# Altium PCB 2019_PerfUSB_ch340.PcbDoc
Units mil, origin at the board's own origin, x right, y up, seen from the top; angles counter-clockwise.
Board outline 690 x 1915 mil, 4 copper layers (1-TOP, 2-Signal, 3-GND, 4-BOT); 14 components, 11 nets, 63 pads, 31 vias.
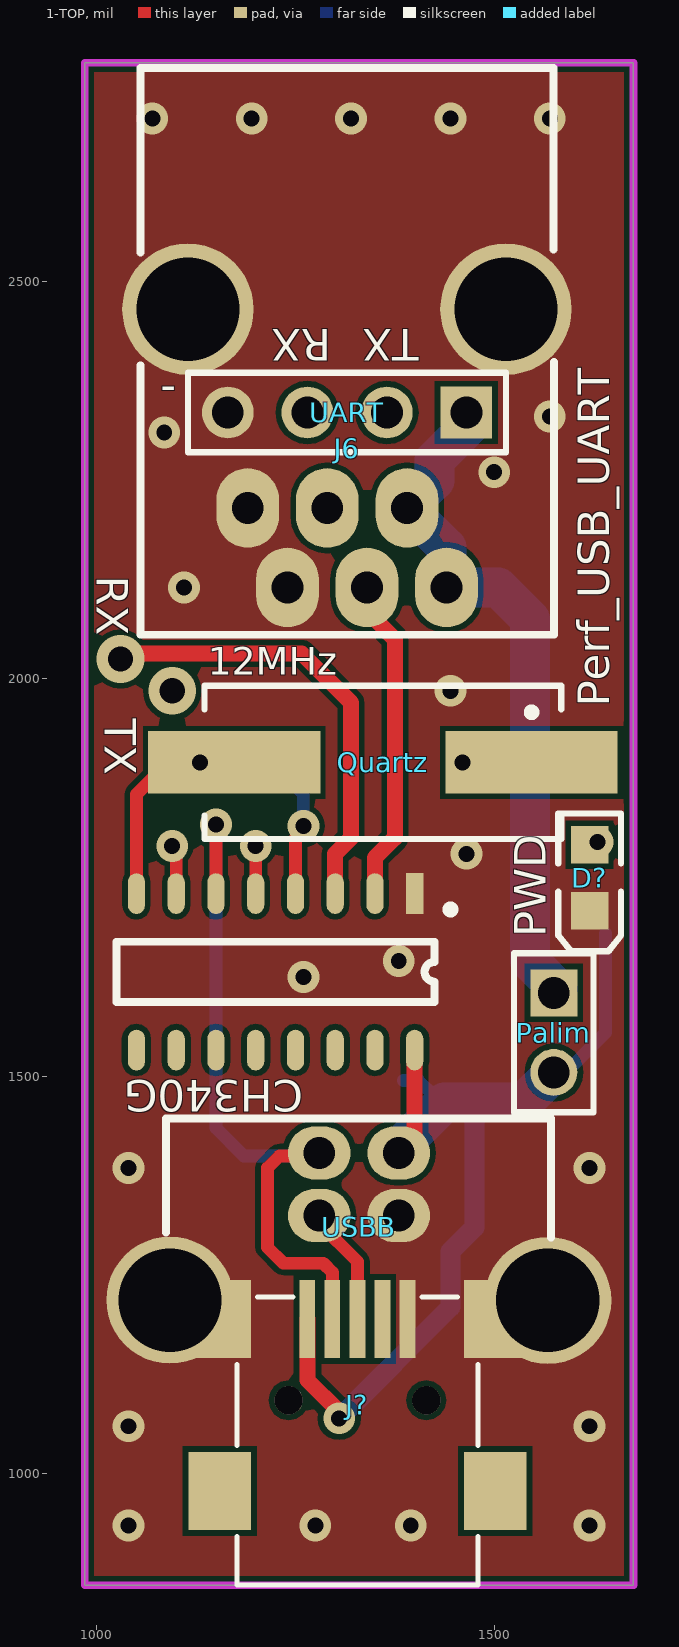
[diagram p0: 1-TOP view]
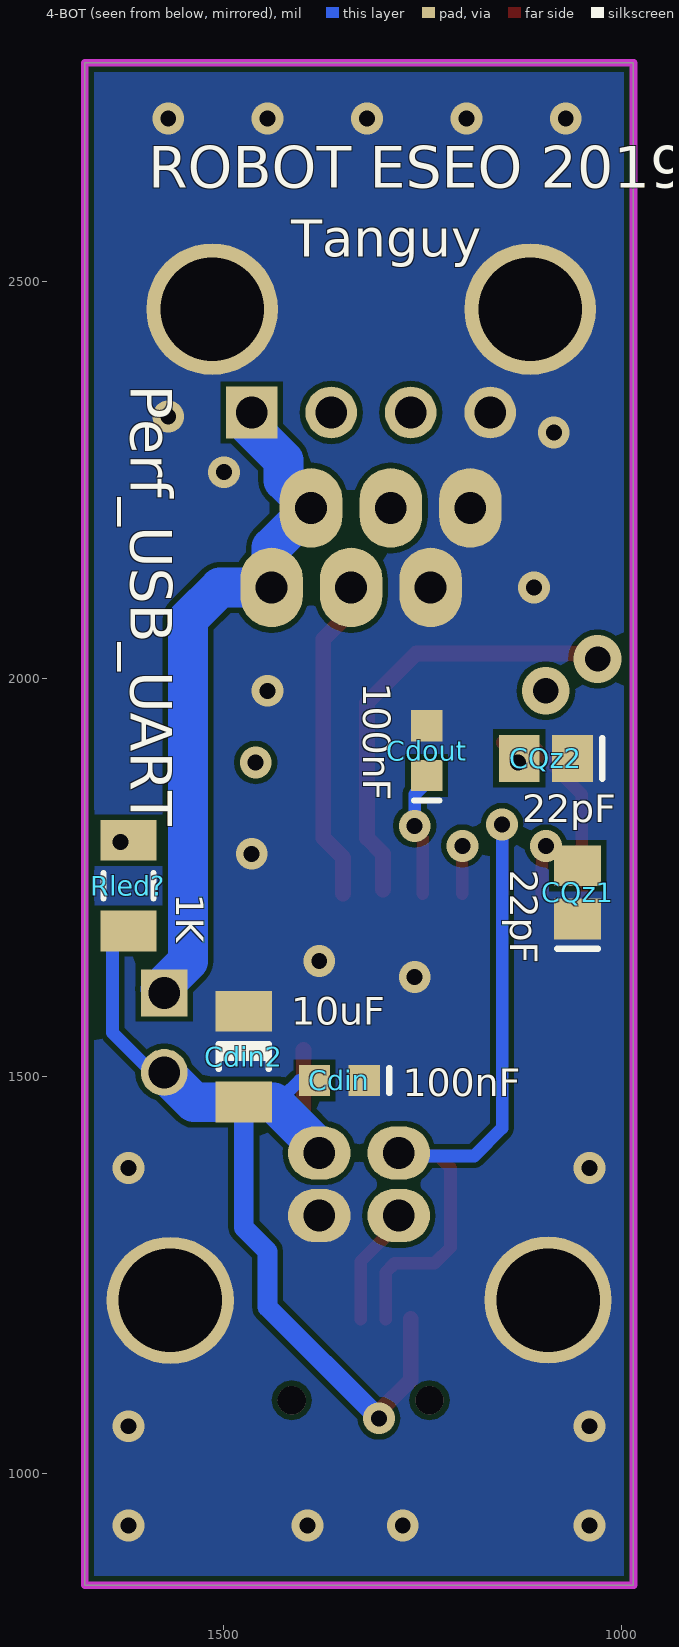
[diagram p1: 4-BOT view, seen from below]
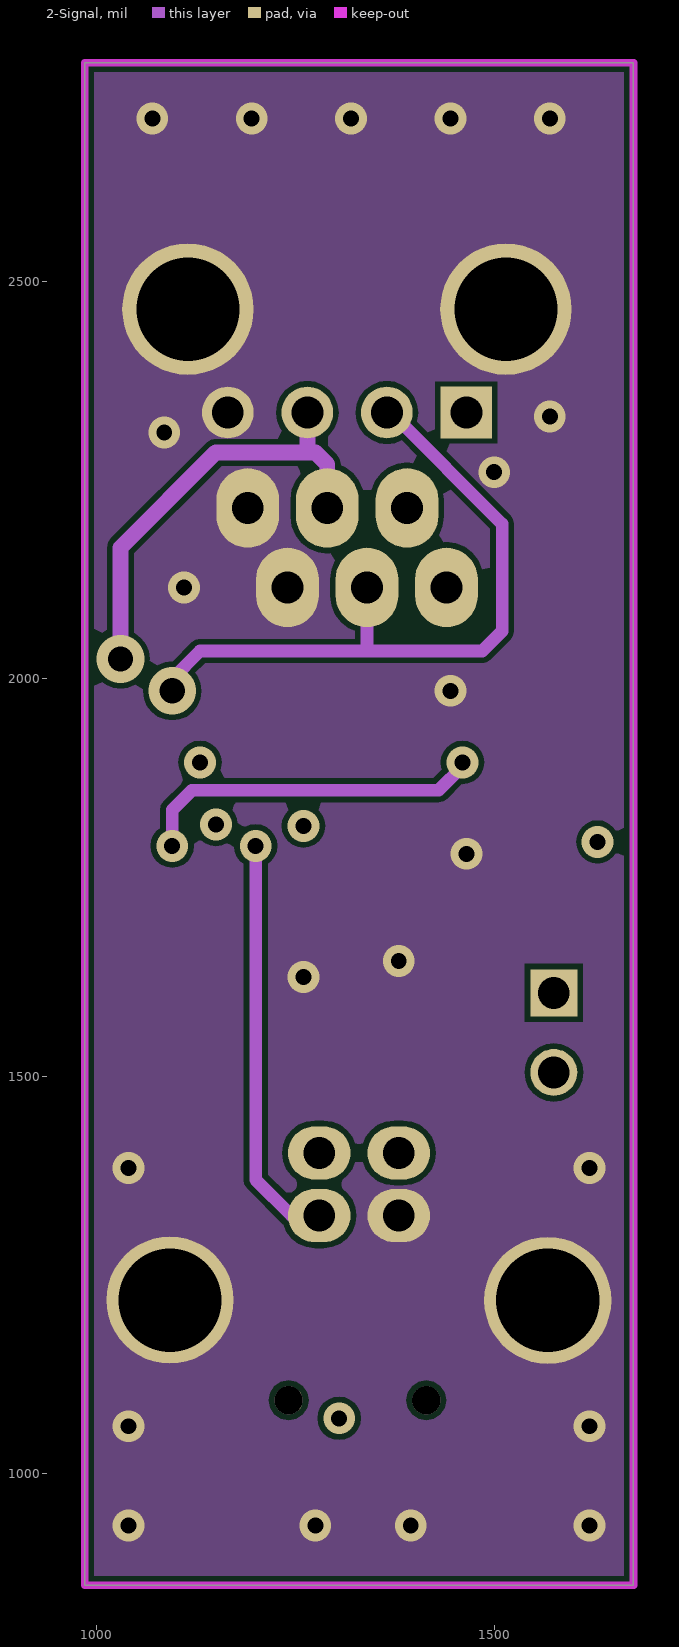
[diagram p2: 2-Signal]
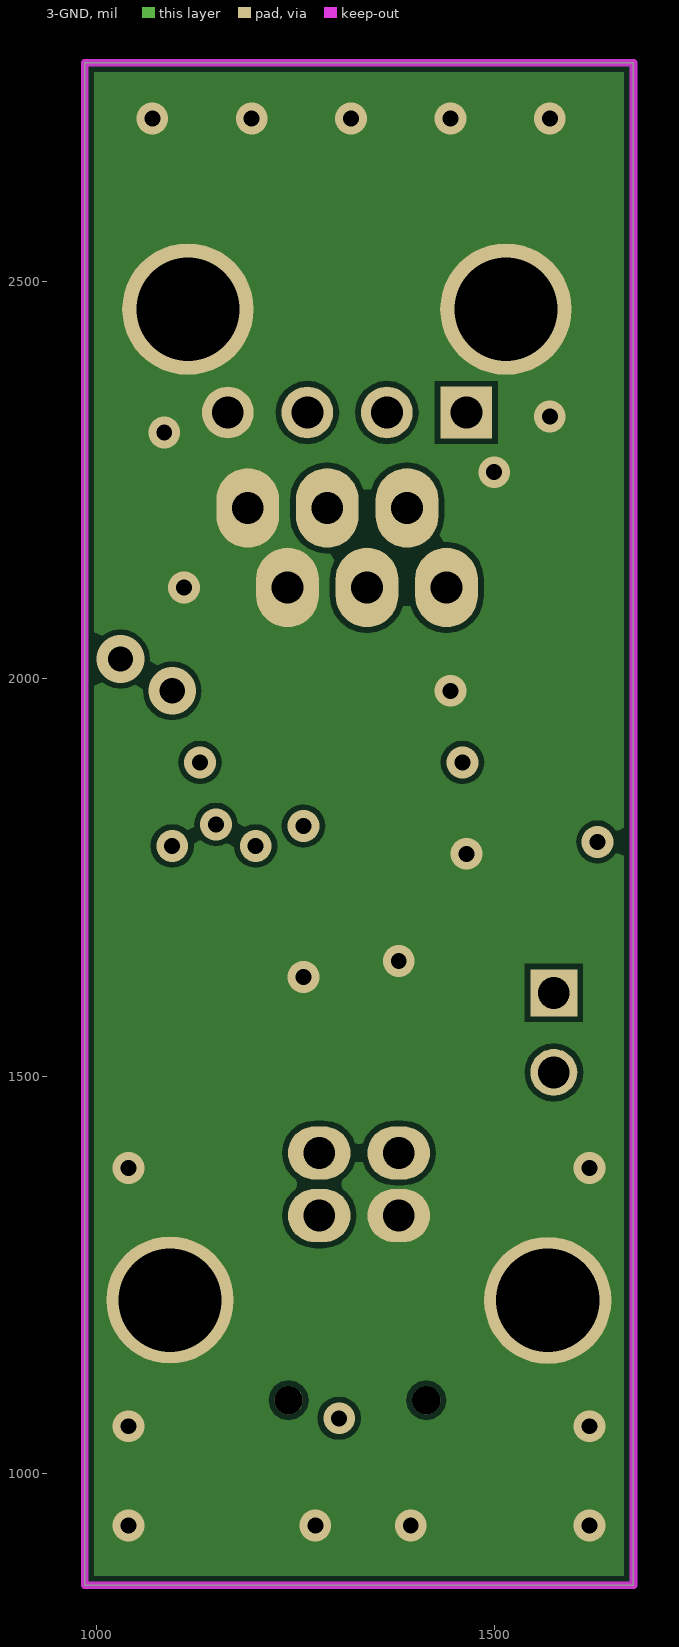
[diagram p3: 3-GND]
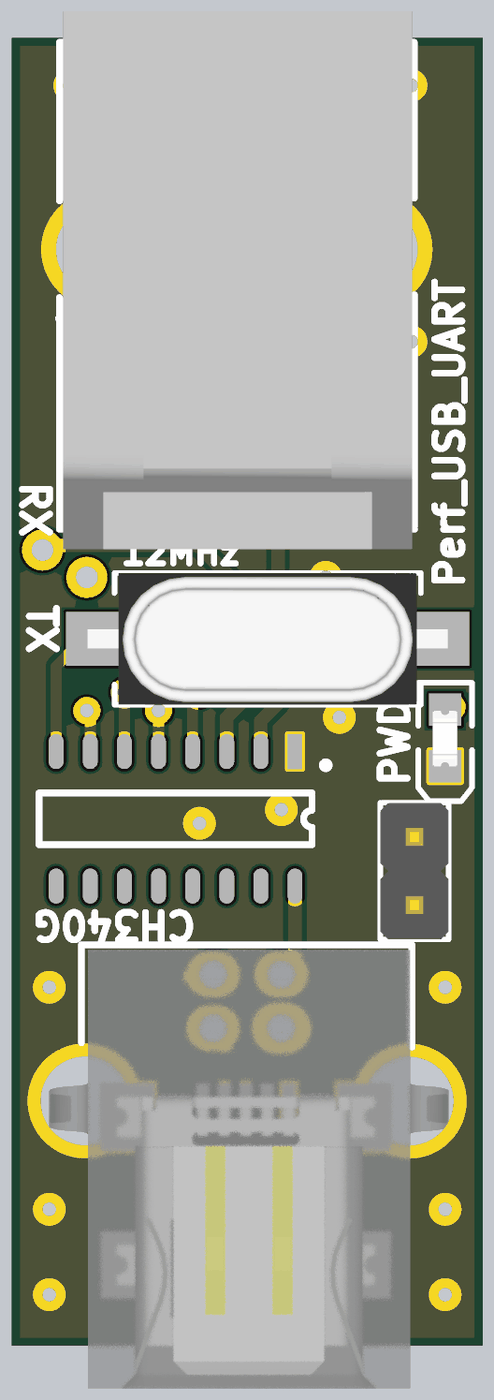
[diagram p4: 3D render of the assembled board from above, using the file's embedded part models]
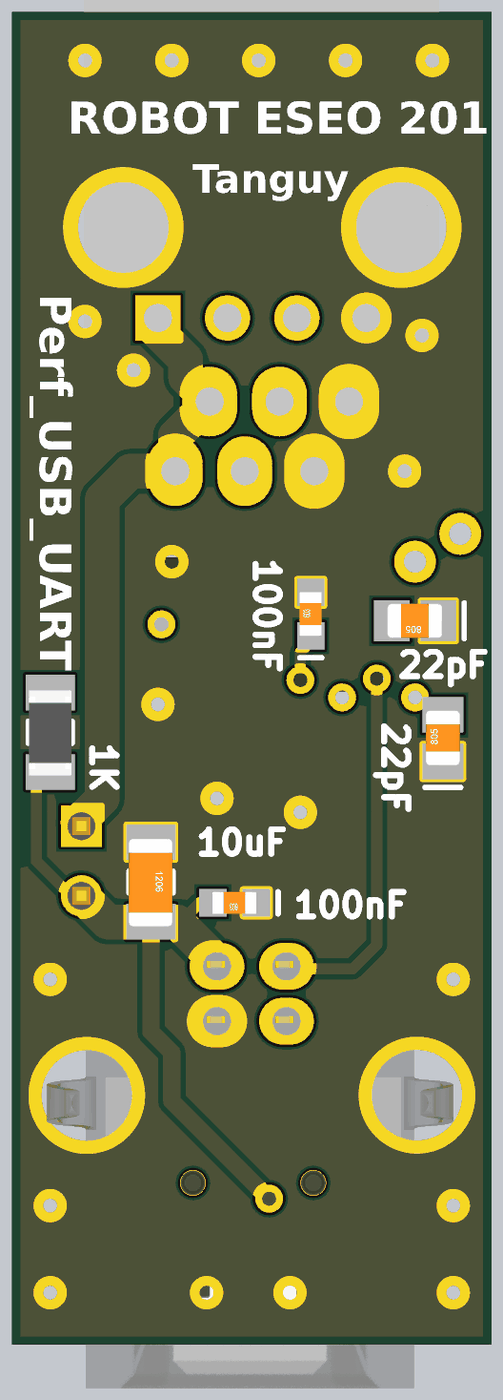
[diagram p5: 3D render of the assembled board from below, using the file's embedded part models]

## Layer stack, top to bottom
Top Solder: solder mask 0.4, Solder Resist, Dk 3.5
1-TOP: signal copper 1.4
Dielectric1: core 12.6, FR-4, Dk 4.8
2-Signal: signal copper 1.4
Dielectric2: prepreg 12.6, FR-4, Dk 4.8
3-GND: signal copper 1.4
Dielectric3: core 12.6, FR-4, Dk 4.8
4-BOT: signal copper 1.4
Bottom Solder: solder mask 0.4, Solder Resist, Dk 3.5

## Board outline
985,860 985,2775 1675,2775 1675,860

## Design rules (kind name [scope] priority, off if disabled: settings)
Clearance [All] p1: gap=7 ignorepadtopadclearanceinfootprint=FALSE except(0: Arc-Hole Track-Hole SMDPad-Hole THPad-Hole Via-Hole Fill-Hole Poly-Hole Region-Hole Text-Hole)
HoleSize [All] p1: absolutevalues=TRUE maxlimit=200 minlimit=1 maxpercent=80.000 minpercent=20.000
PolygonConnect [All] p1: connectstyle=Direct reliefconductorwidth=10 reliefentries=4 polygonreliefangle="90 Angle" airgapwidth=10
RoomDefinition 2019_PerfUSB_ch340 [InComponentClass('2019_PerfUSB_ch340')] p1: confinementstyle=ConfineIn formatcopy=TRUE lockcomponents=FALSE outline 0,0 2000,0 2000,1000 0,1000
RoutingVias [All] p1: holewidth=28 width=50 viastyle="Through Hole" minholewidth=28 minwidth=50 maxholewidth=28 maxwidth=50
SilkToSolderMaskClearance SilkscreenOverComponentPads [IsPad] p1: minsilkscreentomaskgap=10 clearancetoexposedcopper=TRUE
SolderMaskExpansion [All] p1: expansion=4
Width [All] p1: maxlimit=100 minlimit=12 preferedwidth=16
28 further rules are at their usual default settings.

## Components (designator, comment, footprint, x,y, rotation, side; value= is the part's Value field where it differs from the comment)
Cdin "100nF" C0603_N 1355,1495 r0 bottom
Cdin2 "10uF" C1206_N 1475,1525 r270 bottom
Cdout "100nF" C0603_N 1245,1910 r90 bottom
CH340G "CH340G" SOP16 1400,1730 r270 top
CQz1 "22pF" C0805_N 1055,1731.54 r90 bottom
CQz2 "22pF" C0805_N 1095,1900 r0 bottom
D? "LED" LED_0805 1620,1750 r270 top
J6 "UART" RJ11_6/6 1240,2115 r90 top
J? "Mini USB 2.0 Type B" USB_MiniB_Horizontal 1327.99,1042.44 r0 top
Palim "Jump" HDR1X2 1575,1605 r270 top
Quartz "12MHz" HC49/4H_SMX 1360,1895 r180 top
Rled? "1K" R1206_N 1620,1740 r270 bottom
UART "BARRETTE4" HDR1X4 1465,2335 r180 top
USBB "USB_B" USB_B_COUDE 1280,1403.74 r0 top

## Footprints (in the part's own frame and the unit in brackets; to place one, negate y for a bottom-side part, rotate by r counter-clockwise, add the part's x,y. Pads: shape width x height; smd on the part's side, far side on the other; paste and mask are expansions set on the pad)
C0603_N [mm] "Chip Capacitor, Body 1.6x0.8mm, IPC Medium Density"
  rect 1x1 smd: 1(-0.8,0) 2(0.787,0)
  silkscreen extent -1.6,-0.4 -1.6,0.4, body extent -0.8,-0.39 0.8,0.41, height 0.32
C0805_N [mm] "Chip Capacitor, Body 2.0x1.3mm, IPC Medium Density"
  rect 1.3x1.5 smd: 1(-0.85,0) 2(0.85,0)
  silkscreen extent -1.8,-0.65 -1.8,0.65, body extent -0.99,-0.63 1.01,0.62, height 0.8
C1206_N [mm] "Chip Capacitor, Body 3.2x1.6mm, IPC Medium Density"
  rect 1.3x1.8 smd: 1(-1.45,0) 2(1.45,0)
  silkscreen extent -0.4,-0.8 0.4,0.8, body extent -1.57,-0.81 1.63,0.79, height 1.02
HC49/4H_SMX [mm] "Quartz Crystal, SM; Body 13.4 (inc. leads) x 4.9 mm (LxW max)"
  rect 5.5x2 smd: 1(-4.75,0) 2(4.75,0)
  silkscreen extent -5.7,-2.45 5.7,2.45, body extent -6.7,-2.45 6.7,2.45, height 5.08
HDR1X2 [mm]
  rect 1.5x1.5 hole 1.016: 1(0,0)
  round 1.5 hole 1.016: 2(2.54,0)
  silkscreen extent -1.27,-1.27 3.81,1.27, body extent -1.27,-1.27 3.81,1.27, height 10.1
HDR1X4 [mil] "Connector; Header; 4 Position"
  rect 65x65 hole 40: 1(0,0)
  round 65 hole 40: 2(100,0) 3(200,0) 4(300,0)
  silkscreen extent -50,-50 350,50
LED_0805 [mm] "SM LED; 2 Flat Leads"
  rect 1.2x1.2 smd: 1(-1.05,0) 2(1.05,0)
  silkscreen extent -2.05,-1 2.35,1, body extent -1.05,-0.64 1.06,0.64, height 1.2
R1206_N [mm] "Chip Resistor, Body 3.2x1.6mm, IPC Medium Density"
  rect 1.3x1.8 smd: 1(-1.45,0) 2(1.45,0)
  silkscreen extent -0.4,-0.8 0.4,0.8, body extent -1.68,-0.87 1.68,0.87, height 0.71
RJ11_6/6 [mm] "Connector; RJ11; 6P/6C; Low Profil; Right Angle; Pin Spacing=2.54mm"
  oval 2.54x2 hole 1.016: 1(0,-5.08) 2(2.54,-3.82) 3(0,-2.54) 4(2.54,-1.27) 5(0,0) 6(2.54,1.27)
  round 4.2 hole 3.302: FIX1(8.89,3.18) FIX2(8.89,-6.98)
  silkscreen extent -1.51,-8.51 16.59,4.7, body extent -2.25,-8.43 17.75,4.57, height 16
SOP16 [mm]
  rect 1.3x0.55 smd: 1(0,0)
  oval 1.3x0.55 smd: 2(0,-1.27) 3(0,-2.54) 4(0,-3.81) 5(0,-5.08) 6(0,-6.35) 7(0,-7.62) 8(0,-8.89) 9(5,-8.89) 10(5,-7.62) 11(5,-6.35) 12(5,-5.08) 13(5,-3.81) 14(5,-2.54) 15(5,-1.27) 16(5,0)
  silkscreen extent 0.38,-9.53 3.46,1.27
USB_B_COUDE [mm] "Connector; USB; type B; 4 Position; Pin Spacing=2.54mm/12.07mm"
  oval 2x1.7 hole 1.016: 1(2.54,0) 2(0,0) 3(0,-2) 4(2.54,-2)
  round 4.064 hole 3.302: FIX1(-4.77,-4.7) FIX2(7.3,-4.71)
  silkscreen extent -4.9,-2.7 7.4,1.1, body extent -6.1,-15.39 8.76,0.91, height 10.75
USB_MiniB_Horizontal [mm] "Mini USB 2.0 Type B SMT Horizontal 5 Contacts ref WURTH : 65100516121"
  rect 0.5x2.5 smd: 1(-1.6,3.875) 2(-0.8,3.875) 3(0,3.875) 4(0.8,3.875) 5(1.6,3.875)
  round 0.9 hole 0.9: M1(-2.2,1.275) M2(2.2,1.275)
  rect 2x2.5 smd: S1(-4.4,3.875) S2(4.4,3.875) S3(-4.4,-1.625) S4(4.4,-1.625)
  silkscreen extent -3.85,-4.62 3.85,4.58, body extent -4.8,-4.63 4.8,4.62, height 3.92

## Part data
Cdin Cdin2 Cdout: library part Capacitor, "Capacitor", LatestRevisionDate=17-Jul-2002, LatestRevisionNote="Re-released for DXP Platform."
  Cdin Cdout: FAR=1740614, Published=01/01/10, Publisher="Damien GUITTON"
  Cdin2: PackageReference=RAD-0.3, Published=8-Jun-2000, Publisher="Altium Limited"
CH340G: "USB to UART"
CQz1 CQz2: library part Condensateur, "Capacitor", LatestRevisionDate=17-Jul-2002, LatestRevisionNote="Re-released for DXP Platform.", PackageReference=RAD-0.3, Published=8-Jun-2000, Publisher="Altium Limited"
D?: "Typical LED", LatestRevisionDate=08-Jul-2005, LatestRevisionNote="Mech Layer 1 removed.", PackageReference=LED-1, Published=8-Jun-2000, Publisher="Altium Limited"
J6: library part CONNECTEUR_RJ12
J?: library part "USB Mini b", "Mini USB 2.0 Type B Vertical THT 5 Contacts WR-COM (ref WURTH : 65100516121)", Operating Temperature="-40 to 105 degC", Part Number=651005136421, Rated Current="1 A", ComponentLink1Description=Manufacturer, ComponentLink1URL=http://www.we-online.de, ComponentLink2Description=Datasheet, ComponentLink2URL=http://katalog.we-online.de/em/datasheet/651005136421%282%29.pdf, Gender=Female, Interface Type="Mini USB 2.0 Type B", Mounting Technology=THT, Orientation=Vertical, Packaging=Tray, Published Date="May 2018", Publisher="Wurth Elektronik"
Palim: library part "Jumper SIP2.54", "Jumper SIP2.54"
Quartz: library part Quartz, "Crystal Oscillator", LatestRevisionDate=17-Jul-2002, LatestRevisionNote="Re-released for DXP Platform.", PackageReference=R38, Published=8-Jun-2000, Publisher="Altium Limited"
Rled?: library part Resistor, "Resistor", LatestRevisionDate=17-Jul-2002, LatestRevisionNote="Re-released for DXP Platform.", PackageReference=AXIAL-0.5, Published=8-Jun-2000, Publisher="Altium Limited"
UART: "Header, 4-Pin", LatestRevisionDate=17-Jul-2002, LatestRevisionNote="Re-released for DXP Platform.", Publisher="Altium Limited"

## Via types
v1: diameter 40, hole 20, 1-TOP to 4-BOT, 29 vias
v2: diameter 60, hole 32, 1-TOP to 4-BOT, 2 vias

## Nets (pads, with @x,y where several pads share a name; then routed paths per layer and width w, separated by ;. In a path a pad name is that pad's centre, name@x,y a point inside that pad or via, vN(x,y) a via of type N, cw(c..) or ccw(c..) an arc to the next point about the centre after c; other vN are vias at no path point)
5V: Cdin2.2 Cdin.2 CH340G.16 J?.1 Palim.2 Rled?.2 USBB.1 | length 1242.8
  1-TOP w20: J?.1 1265,1118.11 1305,1078.11 v1(1305,1070) ; USBB.1@1375,1400 1400,1425 CH340G.16
  4-BOT w16: Cdin.2 1405,1495 1425,1475 ; Palim.2 1590,1505 1640,1555 Rled?.2@1640,1680
  4-BOT w25: v1(1305,1070) 1445,1210 1445,1280 1475,1310 Cdin2.2@1475,1465
  4-BOT w50: USBB.1@1380,1410 1437.5,1467.5 1537.5,1467.5 Palim.2
D+: CH340G.5 J?.3 USBB.3 | length 725.6
  1-TOP w16: CH340G.5 1200,1780 v1@1205,1785 ; USBB.3@1280,1320 1280,1315 1327.99,1267.01 J?.3
  2-Signal w16: v1(1200,1790) 1200,1370 1245,1325 USBB.3 USBB.3@1285,1325
D-: CH340G.6 J?.2 USBB.2 | length 943.8
  1-TOP w16: CH340G.6 v1@1150,1820 ; USBB.2@1280,1400 1230,1400 1215,1385 1215,1285 1235,1265 1285,1265 1296.5,1253.5 J?.2
  4-BOT w16: v1@1150,1820 1150,1435 1185,1400 USBB.2@1280,1400
  other v1: 1150,1817
GND: Cdin2.1 Cdin.1 Cdout.2 CH340G.1 CQz1.1 CQz2.1 D?.2 J6.5 J6.6 J6.FIX1 J6.FIX2 J?.5 J?.S1 J?.S2 UART.4 USBB.4 USBB.FIX1 USBB.FIX2
  other v1: 1040,935 1275,935 1395,935 1620,935 1040,1060 1620,1060 1040,1385 1620,1385 1260,1625 1380,1645 1465,1780 1445,1985 1110,2115 1500,2260 1085,2310 1570,2330 1070,2705 1195,2705 1320,2705 1445,2705 1570,2705
NetCdout_1: Cdout.1 CH340G.4 | length 159.5
  1-TOP w16: CH340G.4 1250,1800 v1@1265,1815
  4-BOT w16: Cdout.1@1240,1875 1260,1855 v1(1260,1815)
NetCH340G_7: CH340G.7 CQz1.2 Quartz.1 | length 499.9
  1-TOP w16: v1(1095,1790) 1100,1785 CH340G.7
  2-Signal w16: v1(1095,1790) 1095,1835 1120,1860 1430,1860 1460,1890 v1(1460,1895)
NetCH340G_8: CH340G.8 CQz2.2 Quartz.2 | length 251.9
  1-TOP w16: CH340G.8 1050,1855 1115,1920 Quartz.2@1150,1920
  other v1: 1130,1895
NetD?_1: D?.1 Rled?.1
  other v1: 1630,1795
URX: CH340G.3 J6.4 UART.3 | length 1121.9
  1-TOP w20: v2@1025,2015 1042,2032 1258,2032 1320,1970 1320,1800 1300,1780 CH340G.3@1300,1735
  2-Signal w20: v2(1030,2025) 1030,2165 1150,2285 1265,2285 ; UART.3@1265,2325 1265,2285 ; J6.4 1290,2270 1275,2285 1265,2285
UTX: CH340G.2 J6.3 UART.2 | length 1267
  1-TOP w20: J6.3@1345,2080 1375,2050 1375,1800 1350,1775 CH340G.2
  2-Signal w16: v2(1095,1985) 1086.94,1985 1083.47,1988.47 1090,1995 1095,2000 1130,2035 1345,2035 ; J6.3 1340,2040 1345,2035 ; UART.2 1370,2335 1510,2195 1510,2060 1485,2035 1345,2035
  4-BOT w16: J6.3@1340,2110 J6.3
VDD_CARTE: J6.1 J6.2 Palim.1 UART.1 | length 859.6
  4-BOT w50: UART.1@1470,2320 1425,2275 1425,2249.61 J6.2 1440,2165.39 J6.1 1505,2115 1545,2075 1545,1645 Palim.1@1580,1610
pads on no net: CH340G.9 CH340G.10 CH340G.11 CH340G.12 CH340G.13 CH340G.14 CH340G.15 J?.4 J?.M1 J?.M2 J?.S3 J?.S4

## Polygon pours and split planes (outlines as drawn)
GND on 1-TOP "1_GND" (solid, pour order 1005): 995,2765 1665,2765 1665,870 995,870
GND on 2-Signal "2_GND" (solid, pour order 1006): 995,2765 1665,2765 1665,870 995,870
GND on 3-GND "3_GND" (solid, pour order 1007): 995,2765 1665,2765 1665,870 995,870
GND on 4-BOT "4_GND" (solid, pour order 1008): 995,2765 1665,2765 1665,870 995,870

## Keep-outs
Keep-Out Layer:
  the board outline again, w10

## Silkscreen, mask and mechanical layers (free items; w line width, h text height)
Top Overlay:
  text "RX" at 1295,2440 h40 r180
  text "TX" at 1405,2440 h40 r180
  text "-" at 1100,2380 h40 r180
  text "RX" at 1000,2130 h40 r270
  text "Perf_USB_UART" at 1645,1965 h40 r90
  text "TX" at 1010,1950 h40 r270
  text "PWD" at 1565,1675 h40 r90
Bottom Overlay:
  text "ROBOT ESEO 2019" at 1595,2600 h90
  text "Tanguy" at 1415,2515 h80
  text "Perf_USB_UART" at 1635,2370 h90 r90